# Altium PCB mom-s.PcbDoc (part 1 of 2)
Units mm, origin at the board's own origin, x right, y up, seen from the top; angles counter-clockwise.
Board outline 16 x 18 mm, 4 copper layers (Top Layer, GND, PWR, Bottom Layer), stack 0.774 mm thick; 61 components, 60 nets, 227 pads, 0 vias.
Unrouted connection lines stored in the file: 160.
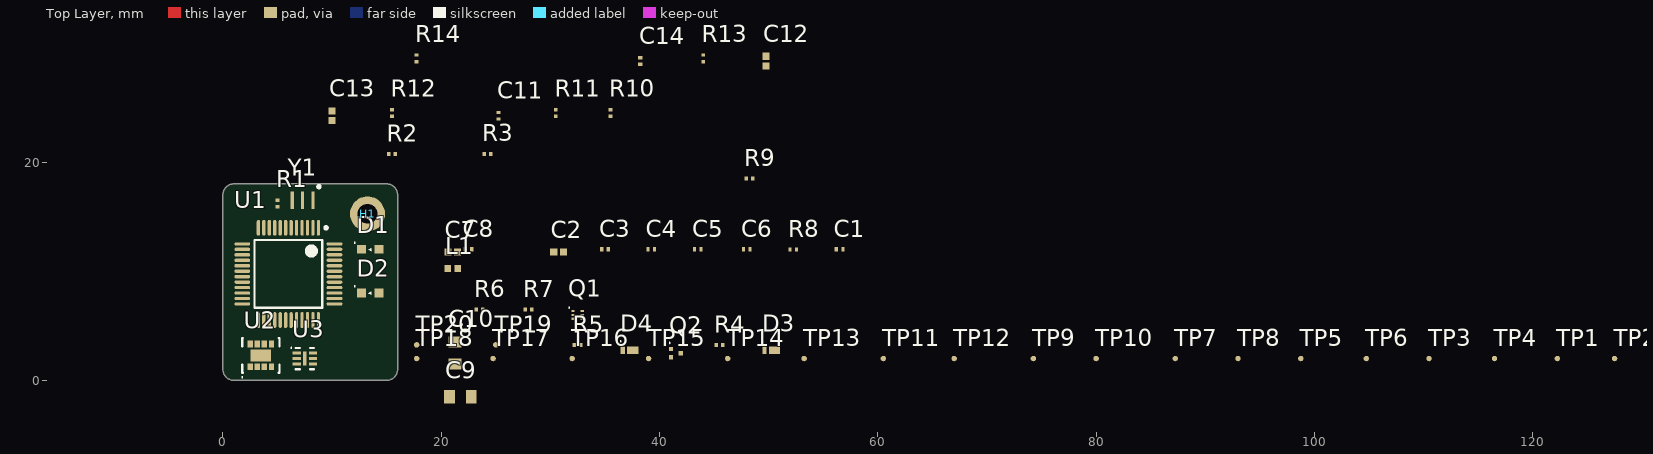
[diagram p0: Top Layer view]
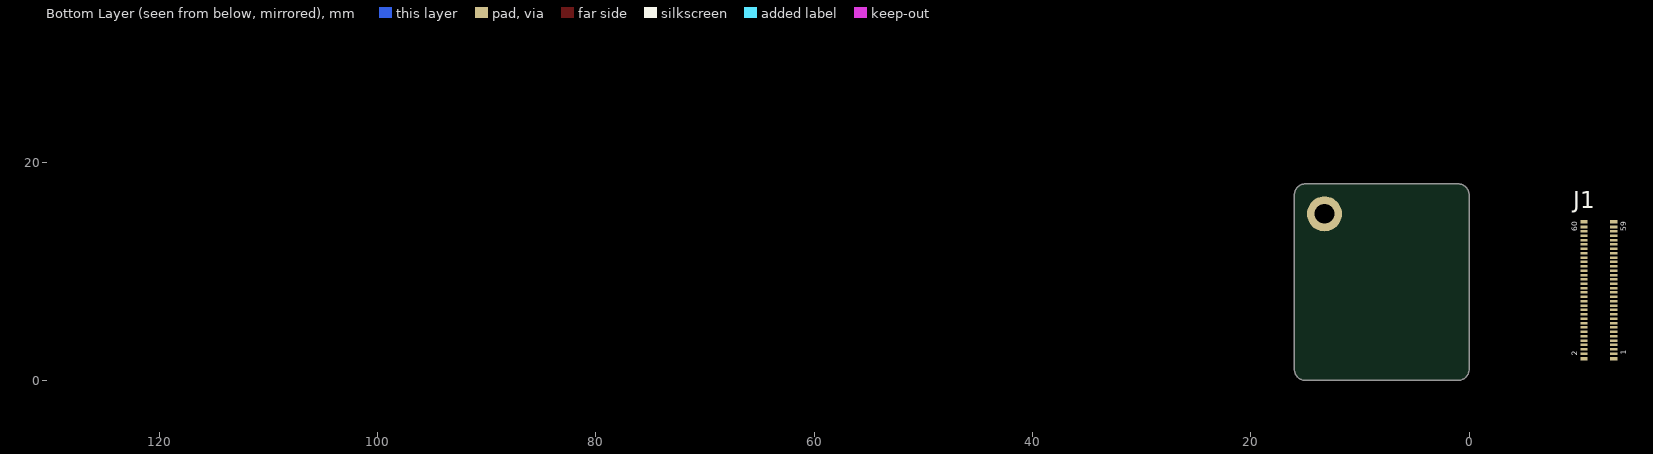
[diagram p1: Bottom Layer view, seen from below]
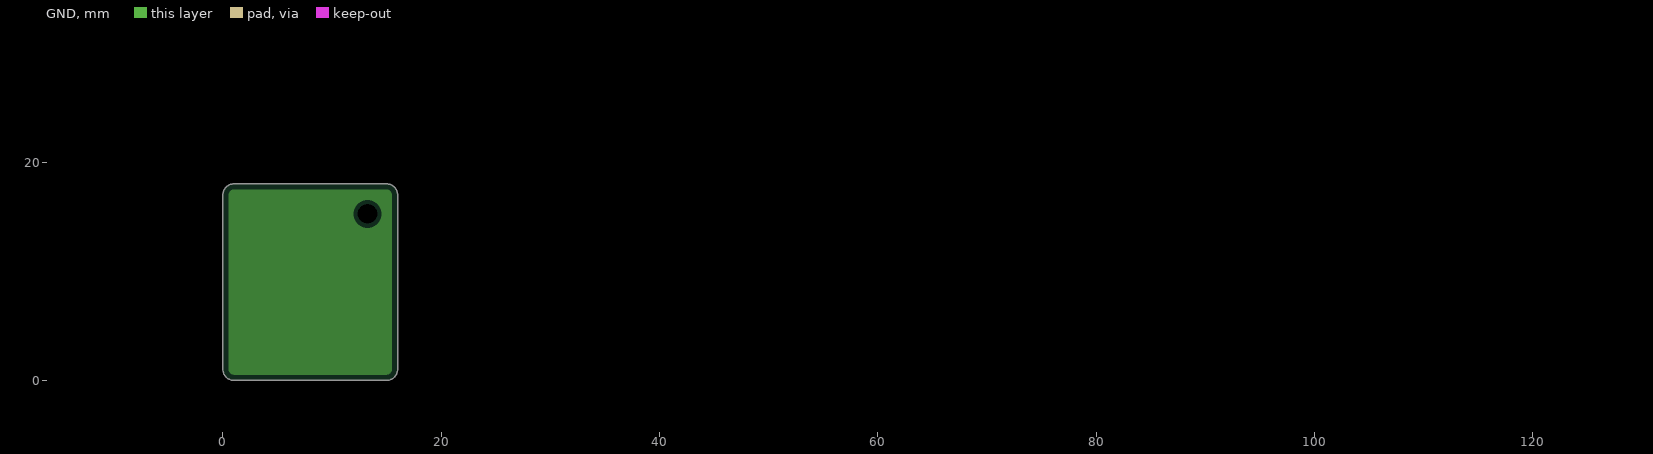
[diagram p2: GND, clearances drawn from the general rule]
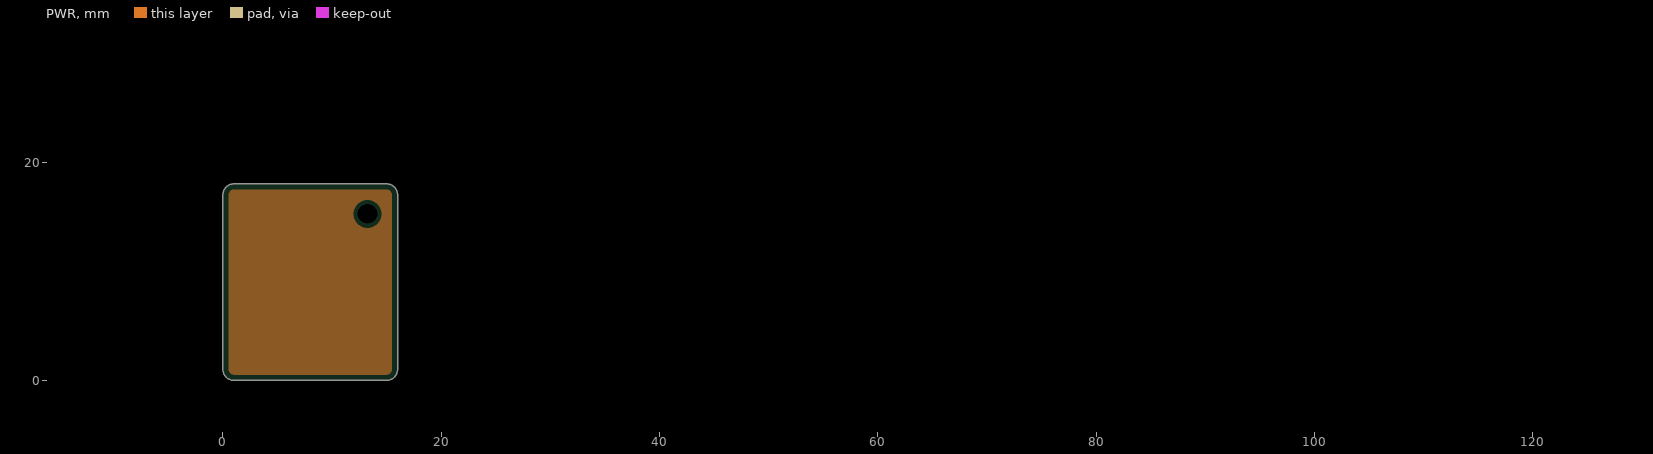
[diagram p3: PWR, clearances drawn from the general rule]

## Layer stack, top to bottom
Top Solder: solder mask 0.0127, Solder Resist, Dk 3.5
Top Layer: signal copper 0.0348
Dielectric 1: prepreg 0.0889, FR-4, Dk 4.2
GND: plane copper 0.0348
Dielectric 3: core 0.4572, Dk 4.2
PWR: plane copper 0.0348
Dielectric 2: prepreg 0.0889, Dk 4.2
Bottom Layer: signal copper 0.0348
Bottom Solder: solder mask 0.0127, Solder Resist, Dk 3.5

## Board outline
0,1 0,17 cw(c1,17) 1,18 15,18 cw(c15,17) 16,17 16,1 cw(c15,1) 15,0 1,0 cw(c1,1)

## Design rules (kind name [scope] priority, off if disabled: settings)
AcuteAngle [All] p1: minimum=6.00000000000000E+0001 checktracksonly=TRUE
BoardOutlineClearance [All] p1: gap=0.254 ignorepadtopadclearanceinfootprint=FALSE
Clearance BGA_1 [WithinRoom('BGA')] p1: gap=0.102 ignorepadtopadclearanceinfootprint=FALSE
Clearance "USB 3H" [InDifferentialPairClass('USB') And Not InComponent('J1', 'J2', 'U3', 'U4') And Not WithinRoom('BGA')] p2: gap=0.267 ignorepadtopadclearanceinfootprint=FALSE
Clearance "Clocks 3H" [InNetClass('Clocks') And Not InComponent('J2', 'U2') And Not WithinRoom('BGA')] p3: gap=0.267 ignorepadtopadclearanceinfootprint=FALSE
Clearance "JTAG 3H Inners" [InNetClass('JTAG') And OnMid] p4: gap=0.305 ignorepadtopadclearanceinfootprint=FALSE
Clearance "JTAG 3H Outers" [InNetClass('JTAG') And OnOutside And Not InComponent('J2', 'U2') And Not WithinRoom('BGA')] p5: gap=0.267 ignorepadtopadclearanceinfootprint=FALSE
Clearance "Default Clearance" [All] p6: gap=0.127 ignorepadtopadclearanceinfootprint=FALSE
ComponentClearance Testpoints [InComponentClass('Testpoints')] p1: gap=0.127 collisioncheckmode=3 verticalgap=0.127 showdistances=FALSE
ComponentClearance "Chip to Chip" [InComponentClass('Chip') vs InComponentClass('Chip')] p2: gap=0.254 collisioncheckmode=3 verticalgap=0.127 showdistances=FALSE
ComponentClearance "All Others" [All] p3: gap=0.635 collisioncheckmode=3 verticalgap=0.127 showdistances=FALSE
DiffPairsRouting USB [InDifferentialPairClass('USB')] p1: maxlimit=0.152 minlimit=0.152 mostfreqgap=0.152 toplayer_minwidth=0.127 toplayer_maxwidth=0.127 toplayer_prefwidth=0.127 bottomlayer_minwidth=0.127 bottomlayer_maxwidth=0.127 bottomlayer_prefwidth=0.127 maxuncoupledlength=12.7
Height "Bottom Max Height" [OnBottom] p1: minheight=0 maxheight=2 prefheight=1.5
Height "Top Max Height" [OnTop] p2: minheight=0 maxheight=3 prefheight=1
HoleToHoleClearance [All] p1: gap=0.127 allowstackedmicrovias=TRUE
Length "Clocks 19mm" [InNetClass('Clocks')] p1: maxlimit=19 minlimit=0
Length "JTAG 100mm" [InNetClass('JTAG')] p2: maxlimit=100 minlimit=0
MatchedLengths "Clocks 0.127mm" [InNetClass('Clocks')] p1: tolerance=0.127 checknetsindiffpair=FALSE checkdiffpairvsdiffpair=TRUE checkxsignals=TRUE checkothers=TRUE
MatchedLengths "USB 3.81mm" [InDifferentialPairClass('USB')] p2: tolerance=3.81 checknetsindiffpair=TRUE checkdiffpairvsdiffpair=FALSE checkxsignals=FALSE checkothers=FALSE
MaxMinImpedance "90ohm DIFF" [InDifferentialPairClass('USB')] p1: minimum=81.00 maximum=99.00
MaxMinImpedance "50ohm SE" [InNetClass('Clocks', 'JTAG')] p2: minimum=45.00 maximum=55.00
MaximumViaCount "USB 1 Via" [InDifferentialPairClass('USB')] p1: limit=1
MinimumAnnularRing "BGA AR" [WithinRoom('BGA')] p1: minimumring=0.076
MinimumAnnularRing [All] p2: minimumring=0.102
MinimumSolderMaskSliver [All] p1: minsoldermaskwidth=0.001
PlaneClearance [All] p1: clearance=0.381
PlaneConnect [All] p1: planeconnectstyle=Direct reliefexpansion=0.508 reliefentries=4 reliefconductorwidth=0.254 reliefairgap=0.254
PolygonConnect [All] p1: connectstyle=Direct reliefconductorwidth=0.254 reliefentries=4 polygonreliefangle="90 Angle" airgapwidth=0.254
RoutingCorners [All] p1: cornerstyle=45-Degree minsetback=0.254 maxsetback=0.254
RoutingLayers "Clocks and USB" [InNetClass('Clocks','USB')] p1: top layer_v5=TRUE bottom layer_v5=TRUE
RoutingLayers "Default Routing" [All] p2: top layer_v5=TRUE bottom layer_v5=TRUE
RoutingVias [All] p1: holewidth=0.203 width=0.457 viastyle="Through Hole" minholewidth=0.203 minwidth=0.406 maxholewidth=100 maxwidth=200
SMDEntry [All] p1: side=TRUE corner=TRUE anyangle=TRUE
SilkToSilkClearance [All] p1: silktosilkclearance=0.127
SilkToSolderMaskClearance [IsPad] p1: minsilkscreentomaskgap=0.127 clearancetoexposedcopper=TRUE
SolderMaskExpansion [All] p1: expansion=0.102
ViasUnderSMD [All] p1: allowed=FALSE
Width "Teensy Power" [InNetClass('Teensy Power')] p1: maxlimit=100 minlimit=0.254 preferedwidth=0.254
Width "Low Power" [InNetClass('Low Power')] p2: maxlimit=100 minlimit=0.254 preferedwidth=0.635
Width "Medium Power" [InNetClass('Medium Power')] p3: maxlimit=100 minlimit=0.254 preferedwidth=1.778
Width "High Power" [InNetClass('High Power')] p4: maxlimit=100 minlimit=0.254 preferedwidth=4.064
Width "Clocks 50ohm" [InNetClass('Clocks')] p5: maxlimit=0.126 minlimit=0.082 preferedwidth=0.102 impedancedriven=TRUE minimp=45.000000 maximp=55.000000 favimp=50.000000
Width "JTAG 50ohm" [InNetClass('JTAG')] p6: maxlimit=0.126 minlimit=0.082 preferedwidth=0.102 impedancedriven=TRUE minimp=45.000000 maximp=55.000000 favimp=50.000000
Width "Default Width" [All] p7: maxlimit=100 minlimit=0.127 preferedwidth=0.203
19 further rules are at their usual default settings.

## Classes and differential pairs
differential pair MCU_USB_D: +MCU_USB_D_P -MCU_USB_D_N

## Components (designator, comment, footprint, x,y, rotation, side; value= is the part's Value field where it differs from the comment)
C1 "0.1uF" C0201 56.5,12 r0 top
C2 "4.7uF" C0402 30.75,11.75 r0 top
C3 "0.1uF" C0201 35,12 r0 top
C4 "0.1uF" C0201 39.25,12 r0 top
C5 "0.1uF" C0201 43.5,12 r0 top
C6 "0.1uF" C0201 48,12 r0 top
C7 "1uF" C0402 21.06,11.75 r0 top
C8 "10000pF" C0201 22.5,12 r0 top
C9 "10uF" C0603 21.75,-1.5 r0 top
C10 "22uF" C0603 21.25,2.5 r90 top
C11 "3300pF" C0201 25.25,24.25 r90 top
C12 "1uF" C0402 49.75,29.25 r90 top
C13 "1uF" C0402 10,24.25 r90 top
C14 "0.1uF" C0201 38.25,29.25 r90 top
D1 "5988091107F" LED0603 13.5,12 r0 top
D2 "5988070107F" LED0603 13.5,8 r0 top
D3 "SDM2U30CSP-7" DIO_X3-WLB1608-2 50.25,2.75 r0 top
D4 "SDM2U30CSP-7" DIO_X3-WLB1608-2 37.25,2.75 r0 top
H1 "M1.6 MNT HOLE" MNT_HOLE_M1.6 13.25,15.25 r0 top
J1 "DF40C-60DP-0.4V(51)" HRS_DF40C_60P_PLG -11.895,8.25 r90 bottom
L1 "BLM15AG601SN1D" L0402 21.045,10.25 r0 top
Q1 "PMDXB600UNE" NXP_DFN1010B-6 32.5,6 r0 top
Q2 "PMXB120EPE" NXP_DFN1010D-3 41.5,2.5 r0 top
R1 "680R" R0201 5,16.2 r90 top
R2 "560R" R0201 15.5,20.75 r0 top
R3 "1k" R0201 24.25,20.75 r0 top
R4 "10k" R0201 45.5,3.25 r0 top
R5 "10k" R0201 32.5,3.25 r0 top
R6 "10k" R0201 23.5,6.5 r0 top
R7 "10k" R0201 28,6.5 r0 top
R8 "10k" R0201 52.25,12 r0 top
R9 "100k" R0201 48.25,18.5 r0 top
R10 "523k" R0201 35.5,24.5 r90 top
R11 "100k" R0201 30.5,24.5 r90 top
R12 "10k" R0201 15.5,24.5 r90 top
R13 "10k" R0201 44,29.5 r90 top
R14 "0R" R0201 17.75,29.5 r90 top
TP1 "TP SMT 0.5MM" TP_SMT_0.5MM 122.25,2 r90 top
TP2 "TP SMT 0.5MM" TP_SMT_0.5MM 127.5,2 r90 top
TP3 "TP SMT 0.5MM" TP_SMT_0.5MM 110.5,2 r90 top
TP4 "TP SMT 0.5MM" TP_SMT_0.5MM 116.5,2 r90 top
TP5 "TP SMT 0.5MM" TP_SMT_0.5MM 98.75,2 r90 top
TP6 "TP SMT 0.5MM" TP_SMT_0.5MM 104.75,2 r90 top
TP7 "TP SMT 0.5MM" TP_SMT_0.5MM 87.25,2 r90 top
TP8 "TP SMT 0.5MM" TP_SMT_0.5MM 93,2 r90 top
TP9 "TP SMT 0.5MM" TP_SMT_0.5MM 74.25,2 r90 top
TP10 "TP SMT 0.5MM" TP_SMT_0.5MM 80,2 r90 top
TP11 "TP SMT 0.5MM" TP_SMT_0.5MM 60.5,2 r90 top
TP12 "TP SMT 0.5MM" TP_SMT_0.5MM 67,2 r90 top
TP13 "TP SMT 0.5MM" TP_SMT_0.5MM 53.25,2 r90 top
TP14 "TP SMT 0.5MM" TP_SMT_0.5MM 46.25,2 r90 top
TP15 "TP SMT 0.5MM" TP_SMT_0.5MM 39,2 r90 top
TP16 "TP SMT 0.5MM" TP_SMT_0.5MM 32,2 r90 top
TP17 "TP SMT 0.5MM" TP_SMT_0.5MM 24.75,2 r90 top
TP18 "TP SMT 0.5MM" TP_SMT_0.5MM 17.75,2 r90 top
TP19 "TP SMT 0.5MM" TP_SMT_0.5MM 25,3.25 r90 top
TP20 "TP SMT 0.5MM" TP_SMT_0.5MM 17.75,3.25 r90 top
U1 "STM32F070CBT6" STM_LQFP48 6,9.75 r270 top
U2 "TPS82140SILT" TI_USIL8_SIL0008D 3.475,2.29 r90 top
U3 "MIC5353-3.3YMT-TR" MCP_MLF6_MT 7.5,2 r0 top
Y1 "CSTCE16M0V53-R0" MUR_CSTCE_V 7.3,16.5 r0 top

## Footprints (in the part's own frame and the unit in brackets; to place one, negate y for a bottom-side part, rotate by r counter-clockwise, add the part's x,y. Pads: shape width x height; smd on the part's side, far side on the other; paste and mask are expansions set on the pad)
C0201 [mm] "Chip Capacitor, 2-Leads, Body 0.60x0.30mm, IPC Medium Density"
  rect 0.3x0.4 smd: 1(-0.3,0) 2(0.3,0)
  body extent -0.32,-0.17 0.32,0.17, height 0.33
C0402 [mm] "Chip Capacitor, 2-Leads, Body 1.00x0.50mm, IPC Medium Density"
  rect 0.66x0.62 smd: 1(-0.44,0) 2(0.44,0)
  body extent -0.53,-0.28 0.53,0.28, height 0.55
C0603 [mm] "Chip Capacitor, 2-Leads, Body 1.60x0.80mm, IPC Medium Density"
  rect 1x1.2 smd: 1(-1,0) 2(1,0)
  body extent -0.87,-0.48 0.87,0.48, height 0.95
DIO_X3-WLB1608-2 [mm] "DFN, 2-Leads, Body 0.80x1.60mm, Pitch 1.28mm, IPC Medium Density"
  rect 0.385x0.69 smd: 1(-0.619,0)
  rect 1.035x0.69 smd: 2(0.293,0)
  Top Layer region: -0.375,0.475
  silkscreen extent -0.86,0.77 -0.76,0.86, body extent -0.82,-0.42 0.82,0.42, height 0.3
HRS_DF40C_60P_PLG [mm] "60 Position Connector Plug, Outer Shroud Contacts Surface Mount Gold"
  rect 0.23x0.66 smd: 1(-5.8,-1.355) 2(-5.8,1.355) 3(-5.4,-1.355) 4(-5.4,1.355) 5(-5,-1.355) 6(-5,1.355) 7(-4.6,-1.355) 8(-4.6,1.355) 9(-4.2,-1.355) 10(-4.2,1.355) 11(-3.8,-1.355) 12(-3.8,1.355) 13(-3.4,-1.355) 14(-3.4,1.355) 15(-3,-1.355) 16(-3,1.355) 17(-2.6,-1.355) 18(-2.6,1.355) 19(-2.2,-1.355) 20(-2.2,1.355) 21(-1.8,-1.355) 22(-1.8,1.355) 23(-1.4,-1.355) 24(-1.4,1.355) 25(-1,-1.355) 26(-1,1.355) 27(-0.6,-1.355) 28(-0.6,1.355) 29(-0.2,-1.355) 30(-0.2,1.355) 31(0.2,-1.355) 32(0.2,1.355) 33(0.6,-1.355) 34(0.6,1.355) 35(1,-1.355) 36(1,1.355) 37(1.4,-1.355) 38(1.4,1.355) 39(1.8,-1.355) 40(1.8,1.355) 41(2.2,-1.355) 42(2.2,1.355) 43(2.6,-1.355) 44(2.6,1.355) 45(3,-1.355) 46(3,1.355) 47(3.4,-1.355) 48(3.4,1.355) 49(3.8,-1.355) 50(3.8,1.355) 51(4.2,-1.355) 52(4.2,1.355) 53(4.6,-1.355) 54(4.6,1.355) 55(5,-1.355) 56(5,1.355) 57(5.4,-1.355) 58(5.4,1.355) 59(5.8,-1.355) 60(5.8,1.355)
  rect 0.35x0.66 smd: 61(-6.275,-1.355) 62(-6.275,1.355) 63(6.275,-1.355) 64(6.275,1.355)
  body extent -6.76,-1.47 6.76,1.5, height 1.11
L0402 [mm] "Chip Inductor, 2-Leads, Body 1.00x0.50mm, IPC Medium Density"
  rect 0.59x0.62 smd: 1(-0.455,0) 2(0.455,0)
  body extent -0.53,-0.28 0.53,0.28, height 0.55
LED0603 [mm] "Chip Diode, 2-Leads, Body 1.60x0.80mm, IPC Medium Density"
  rect 0.8x0.8 smd: 1(-0.8,0) 2(0.8,0)
  silkscreen extent -1.46,-0.13 0.1,0.66, body extent -0.81,-0.39 0.81,0.39, height 0.71
MCP_MLF6_MT [mm] "SON, 6-Leads, Body 1.60x1.60mm, Pitch 0.50mm, Thermal Pad 1.26x0.33mm, IPC Medium Density"
  rect 0.75x0.25 smd: 1(-0.74,0.5) 2(-0.74,0) 3(-0.74,-0.5) 4(0.74,-0.5) 5(0.74,0) 6(0.74,0.5)
  rect 0.33x1.26 smd: 7(0,0)
  silkscreen extent -1.27,-0.98 0.82,1.02, body extent -0.83,-0.82 0.83,0.82, height 0.6
MNT_HOLE_M1.6 [mm] "M1.6 Mounting Hole Footprint"
  round 3.2 hole 1.8: 1(0,0)
MUR_CSTCE_V [mm] "3-SMD Ceramic Resonator, 3.2mm x 1.3mm"
  rect 0.3x1.6 smd: 1(0.95,0) 2(0,0) 3(-0.95,0)
  silkscreen extent 1.38,1.13 1.63,1.37, body extent -1.6,-0.65 1.6,0.65, height 1
NXP_DFN1010B-6 [mm] "SON, 6-Leads, Body 1.10x1.00mm, Pitch 0.35mm, IPC Medium Density"
  rect 0.3x0.2 smd: 1(-0.425,0.35) 2(-0.425,0) 3(-0.425,-0.35) 4(0.425,-0.35) 5(0.425,0) 6(0.425,0.35)
  silkscreen extent -0.84,0.61 -0.74,0.71, body extent -0.53,-0.58 0.53,0.58, height 0.4
NXP_DFN1010D-3 [mm] "DFN, 3-Leads, Body 1.00x1.10mm, Pitch 0.90mm, IPC Medium Density"
  rect 0.4x0.4 smd: 1(-0.45,0.375) 2(-0.45,-0.375) 3(0.45,0)
  silkscreen extent -0.62,0.88 -0.53,0.97, body extent -0.59,-0.53 0.59,0.53, height 0.4
R0201 [mm] "Chip Resistor, 2-Leads, Body 0.60x0.30mm, IPC Medium Density"
  rect 0.3x0.35 smd: 1(-0.3,0) 2(0.3,0)
  body extent -0.32,-0.17 0.32,0.17, height 0.26
STM_LQFP48 [mm] "TSQFP, 48-Leads, Body 7.00x7.00mm, Pitch 0.50mm, IPC Medium Density"
  oval 1.45x0.3 smd: 1(-4.225,2.75) 2(-4.225,2.25) 3(-4.225,1.75) 4(-4.225,1.25) 5(-4.225,0.75) 6(-4.225,0.25) 7(-4.225,-0.25) 8(-4.225,-0.75) 9(-4.225,-1.25) 10(-4.225,-1.75) 11(-4.225,-2.25) 12(-4.225,-2.75) 25(4.225,-2.75) 26(4.225,-2.25) 27(4.225,-1.75) 28(4.225,-1.25) 29(4.225,-0.75) 30(4.225,-0.25) 31(4.225,0.25) 32(4.225,0.75) 33(4.225,1.25) 34(4.225,1.75) 35(4.225,2.25) 36(4.225,2.75)
  oval 0.3x1.45 smd: 13(-2.75,-4.225) 14(-2.25,-4.225) 15(-1.75,-4.225) 16(-1.25,-4.225) 17(-0.75,-4.225) 18(-0.25,-4.225) 19(0.25,-4.225) 20(0.75,-4.225) 21(1.25,-4.225) 22(1.75,-4.225) 23(2.25,-4.225) 24(2.75,-4.225) 37(2.75,4.225) 38(2.25,4.225) 39(1.75,4.225) 40(1.25,4.225) 41(0.75,4.225) 42(0.25,4.225) 43(-0.25,4.225) 44(-0.75,4.225) 45(-1.25,4.225) 46(-1.75,4.225) 47(-2.25,4.225) 48(-2.75,4.225)
  silkscreen extent -4.35,-3.1 3.1,3.58, body extent -4.5,-4.5 4.5,4.5, height 1.6
TI_USIL8_SIL0008D [mm] "PSON, 8-Leads, Body 3.00x2.80mm, Pitch 0.65mm, Thermal Pad 1.90x1.08mm, IPC Medium Density"
  rect 0.6x0.5 smd: 1(-1.04,0.975) 2(-1.04,0.325) 3(-1.04,-0.325) 4(-1.04,-0.975) 5(1.04,-0.975) 6(1.04,-0.325) 7(1.04,0.325) 8(1.04,0.975)
  rect 1.08x1.9 smd: 9(0,0)
  silkscreen extent -2.05,-1.7 1.6,1.75, body extent -1.45,-1.55 1.45,1.55, height 1.53
TP_SMT_0.5MM [mm] "0.5mm SMT Testpoint"
  round 0.5 smd: 1(0,0)

## Part data
C1 C3 C4 C5 C6 C14: library part "0.1uF 16V 0201", "CAP CER 0.1UF 16V X5R 0201", Capacitance=1E-07f, Case/Package=0201, Case Code (Metric)=0603, Dielectric=X5R, Manufacturer=Murata, Manufacturer Part Number=GRM033R61C104ME84D, Max Operating Temperature=85°C, Min Operating Temperature=-55°C, Package Quantity=15000, Supplier Part Number 1=490-9986-1-ND, Tolerance=20%, Voltage Rating=16V, Case Code (Imperial)=0201, ComponentLink1Description=http://www.mouser.com/ds/2/281/c02e-2905.pdf, ComponentLink1URL=http://www.mouser.com/ds/2/281/c02e-2905.pdf, Height=0.3mm, Length=0.024inch, Packaging="Tape and Reel", Pricing 1="1=0.1, 10=0.029, 100=0.013, 500=0.0093, 1000=0.0073, 2500=0.0067, 5000=0.0061 (USD)", Stock 1=660567, Supplier 1=Digi-Key, Termination=SMD/SMT, Thickness=0.013inch, Voltage Rating (DC)=16V, Weight=1.2E-05oz, Width=0.3mm
C2: library part "4.7uF 16V 0402", "CAP CER 4.7UF 16V X5R 0402", Case/Package=0402, Case Code (Metric)=1005, Dielectric=X5R, Manufacturer=Samsung, Manufacturer Part Number=CL05A475MO5NUNC, Max Operating Temperature=85°C, Min Operating Temperature=-55°C, Supplier Part Number 1=1276-6836-1-ND, Tolerance=20%, Voltage Rating=16V, Capacitance=4.7uF, Case Code (Imperial)=0402, Length=0.039inch, Packaging="Tape and Reel", Pricing 1="1=0.36, 10=0.248, 100=0.1485, 500=0.1114, 1000=0.0941, 2500=0.0891, 5000=0.0842 (USD)", Stock 1=282710, Supplier 1=Digi-Key, Thickness=0.022inch, Width=0.02inch
C7 C12 C13: library part "1uF 25V 0402", "CAP CER 1UF 25V X5R 0402", Case/Package=0402, Case Code (Metric)=1005, Dielectric=X5R, Manufacturer="Taiyo Yuden", Manufacturer Part Number=TMK105BJ105MV-F, Max Operating Temperature=85°C, Min Operating Temperature=-55°C, Package Quantity=1, Supplier Part Number 1=587-3245-1-ND, Tolerance=20%, Voltage Rating=25V, Capacitance=1uF, Case Code (Imperial)=0402, ComponentLink1Description=https://datasheet.ciiva.com/11596/tmk105bj105mv-f-ss-11596466.pdf, ComponentLink1URL=https://datasheet.ciiva.com/11596/tmk105bj105mv-f-ss-11596466.pdf, ComponentLink2Description=https://datasheet.ciiva.com/15922/tmk105bj105mv-f-pdf-15922317.pdf, ComponentLink2URL=https://datasheet.ciiva.com/15922/tmk105bj105mv-f-pdf-15922317.pdf, ComponentLink3Description=https://datasheet.ciiva.com/13404/mlcc-all-e-541559-13404206.pdf, ComponentLink3URL=https://datasheet.ciiva.com/13404/mlcc-all-e-541559-13404206.pdf, ComponentLink4Description=https://datasheet.ciiva.com/30154/128tmk105bj105mv-f-30154639.pdf, ComponentLink4URL=https://datasheet.ciiva.com/30154/128tmk105bj105mv-f-30154639.pdf, Composition=Ceramic, Depth=0.5mm, Halogen Free="Halogen Free", Height=0.5mm, Length=1mm, Mount="Surface Mount", Packaging="Tape and Reel", Pricing 1="1=0.2, 10=0.14, 100=0.066, 500=0.0463, 1000=0.0383, 2500=0.0357, 5000=0.0326 (USD)", Radiation Hardening=No, Stock 1=113342, Supplier 1=Digi-Key, Termination=SMD/SMT, Thickness=0.022inch, Voltage Rating (DC)=25V, Width=0.02inch
C8: library part "10000pF 25V 0201", "CAP CER 10000PF 25V X5R 0201", Capacitance=10nF, Case/Package=0201, Case Code (Metric)=0603, Dielectric=X5R, Manufacturer=Murata, Manufacturer Part Number=GRM033R61E103MA12D, Max Operating Temperature=85°C, Min Operating Temperature=-55°C, Supplier Part Number 1=490-9992-1-ND, Tolerance=20%, Voltage Rating=25V, Case Code (Imperial)=0201, ComponentLink1Description=http://search.murata.co.jp/Ceramy/image/img/A01X/partnumbering_e_01.pdf, ComponentLink1URL=http://search.murata.co.jp/Ceramy/image/img/A01X/partnumbering_e_01.pdf, Length=0.024inch, Mount="Surface Mount", Packaging="Tape and Reel", Pricing 1="1=0.1, 10=0.024, 100=0.0106, 500=0.00756, 1000=0.00595, 2500=0.00541, 5000=0.00497 (USD)", Stock 1=20535, Supplier 1=Digi-Key, Thickness=0.013inch, Voltage Rating (DC)=25V, Width=0.012inch
C9: library part "10uF 25V 0603", "CAP CER 10UF 25V X5R 0603", Case/Package=0603, Case Code (Metric)=1608, Dielectric=X5R, Manufacturer=Murata, Manufacturer Part Number=GRM188R61E106MA73D, Max Operating Temperature=85°C, Min Operating Temperature=-55°C, Package Quantity=1, Supplier Part Number 1=490-7202-1-ND, Tolerance=20%, Voltage=25V, Capacitance=10uF, Case Code (Imperial)=0603, ComponentLink1Description=https://datasheet.ciiva.com/22619/c02e-22619674.pdf, ComponentLink1URL=https://datasheet.ciiva.com/22619/c02e-22619674.pdf, ComponentLink2Description=https://datasheet.ciiva.com/22776/608985-22776426.pdf, ComponentLink2URL=https://datasheet.ciiva.com/22776/608985-22776426.pdf, ComponentLink3Description=https://datasheet.ciiva.com/22776/c02e-22776427.pdf, ComponentLink3URL=https://datasheet.ciiva.com/22776/c02e-22776427.pdf, ComponentLink4Description=https://datasheet.ciiva.com/14906/partnumbering-e-01-14906429.pdf, ComponentLink4URL=https://datasheet.ciiva.com/14906/partnumbering-e-01-14906429.pdf, ComponentLink5Description=https://datasheet.ciiva.com/14906/partnumbering-e-01-14906431.pdf, ComponentLink5URL=https://datasheet.ciiva.com/14906/partnumbering-e-01-14906431.pdf, Composition=Ceramic, Depth=0.8mm, Height=0.8mm, Lead Free="Lead Free", Length=1.6mm, Mount="Surface Mount", Number of Pins=2, Packaging="Tape and Reel", Pricing 1="1=0.41, 10=0.285, 100=0.1708, 500=0.1281, 1000=0.1082 (USD)", REACH SVHC="No SVHC", Stock 1=1088965, Supplier 1=Digi-Key, Termination=SMD/SMT, Thickness=0.031inch, Voltage Rating=25V, Voltage Rating (DC)=25V, Weight=0.000222oz, Width=0.031inch
C10: library part "22uF 16V 0603", "CAP CER 22UF 16V X5R 0603", Manufacturer=Samsung, Manufacturer Part Number=CL10A226MO7JZNC, Supplier Part Number 1=1276-7076-1-ND, Stock 1=0, Supplier 1=Digi-Key
C11: library part "3300pF 16V 0201", "CAP CER 3300PF 16V X7R 0201", Capacitance=3.3nF, Case/Package=0201, Case Code (Metric)=0603, Dielectric=X7R, Manufacturer=Murata, Manufacturer Part Number=GRM033R71C332KA88D, Max Operating Temperature=125°C, Min Operating Temperature=-55°C, Package Quantity=1, Supplier Part Number 1=490-3191-1-ND, Tolerance=10%, Voltage Rating=16V, Case Code (Imperial)=0201, ComponentLink1Description=https://datasheet.ciiva.com/11620/product-11620449.pdf, ComponentLink1URL=https://datasheet.ciiva.com/11620/product-11620449.pdf, ComponentLink2Description=https://datasheet.ciiva.com/129/grm033r71c332ka88-01-129900.pdf, ComponentLink2URL=https://datasheet.ciiva.com/129/grm033r71c332ka88-01-129900.pdf, ComponentLink3Description=https://datasheet.ciiva.com/129/grm033r71c332ka88-01-129901.pdf, ComponentLink3URL=https://datasheet.ciiva.com/129/grm033r71c332ka88-01-129901.pdf, ComponentLink4Description=https://datasheet.ciiva.com/18184/getdatasheetpartid-467171-18184093.pdf, ComponentLink4URL=https://datasheet.ciiva.com/18184/getdatasheetpartid-467171-18184093.pdf, ComponentLink5Description=https://datasheet.ciiva.com/129/grm033r71c332ka88-01-129902.pdf, ComponentLink5URL=https://datasheet.ciiva.com/129/grm033r71c332ka88-01-129902.pdf, ComponentLink6Description=https://datasheet.ciiva.com/29199/455779-da-01-en-vs-kondensator-0201-29199166.pdf, ComponentLink6URL=https://datasheet.ciiva.com/29199/455779-da-01-en-vs-kondensator-0201-29199166.pdf, Depth=0.3mm, Height=0.3mm, Lead Free="Lead Free", Length=0.6mm, Material=Ceramic, Mount="Surface Mount", Packaging="Tape and Reel", Pricing 1="1=0.1, 10=0.029, 100=0.013, 500=0.0093, 1000=0.0073, 2500=0.0067, 5000=0.0061 (USD)", Radiation Hardening=No, Stock 1=49387, Supplier 1=Digi-Key, Termination=SMD/SMT, Thickness=0.013inch, Voltage Rating (DC)=16V, Width=0.012inch
D1: library part "Blue 0603 LED", "LED BLUE CLEAR 0603 SMD", Case/Package=0603, Case Code (Metric)=1608, Colour=Blue, Forward Current=20mA, Forward Voltage=3.2V, Lens Colour=Clear,Colorless, Manufacturer=Dialight, Manufacturer Part Number=598-8091-107F, Max Operating Temperature=100°C, Min Operating Temperature=-30°C, Package Quantity=4000, Power Dissipation=70mW, Supplier Part Number 1=350-2037-1-ND, Case Code (Imperial)=0603, ComponentLink1Description=https://datasheet.ciiva.com/15118/getdatasheetpartid-194139-15118048.pdf, ComponentLink1URL=https://datasheet.ciiva.com/15118/getdatasheetpartid-194139-15118048.pdf, ComponentLink2Description=https://datasheet.ciiva.com/2111/598-series-0603-pkg-2111556.pdf, ComponentLink2URL=https://datasheet.ciiva.com/2111/598-series-0603-pkg-2111556.pdf, ComponentLink3Description=https://datasheet.ciiva.com/2111/598-series-0603-pkg-2111557.pdf, ComponentLink3URL=https://datasheet.ciiva.com/2111/598-series-0603-pkg-2111557.pdf, ComponentLink4Description=https://datasheet.ciiva.com/15965/mdei5980603-15965445.pdf, ComponentLink4URL=https://datasheet.ciiva.com/15965/mdei5980603-15965445.pdf, ComponentLink5Description=https://datasheet.ciiva.com/30240/mdei5980603-30240533.pdf, ComponentLink5URL=https://datasheet.ciiva.com/30240/mdei5980603-30240533.pdf, ComponentLink6Description=https://datasheet.ciiva.com/2111/598-series-0603-pkg-2111558.pdf, ComponentLink6URL=https://datasheet.ciiva.com/2111/598-series-0603-pkg-2111558.pdf, ComponentLink7Description=https://datasheet.ciiva.com/7970/25658-7970182.pdf, ComponentLink7URL=https://datasheet.ciiva.com/7970/25658-7970182.pdf, ComponentLink8Description=https://datasheet.ciiva.com/14603/70081992-14603963.pdf, ComponentLink8URL=https://datasheet.ciiva.com/14603/70081992-14603963.pdf, ComponentLink9Description=https://datasheet.ciiva.com/16400/smt-selector-guide-16400478.pdf, ComponentLink9URL=https://datasheet.ciiva.com/16400/smt-selector-guide-16400478.pdf, Depth=0.8mm, Dominant Wavelength=470nm, Height=0.7mm, Illumination Colour=Blue, Lead Free="Lead Free", Length=1.6mm, Lens Style=Clear,Diffused,Colorless,Rectangular, Lens Transparency=Clear, Luminous Intensity=140mcd, Mount="Surface Mount", Number of Elements=1, Number of LEDs=1, Number of Pins=2, Packaging="Tape and Reel", Pricing 1="1=0.75, 10=0.583, 25=0.4864, 100=0.4189, 250=0.374, 500=0.3216, 1000=0.2483 (USD)", Radiation Hardening=No, REACH SVHC="No SVHC", Stock 1=42042, Supplier 1=Digi-Key, Test Current=20mA, Viewing Angle=140°, Wavelength=475nm, Width=0.8mm
D2: library part "Green 0603 LED", "LED GREEN CLEAR 0603 SMD", Case/Package=0603, Case Code (Metric)=1608, Colour=Green, Forward Current=20mA, Forward Voltage=2V, Lens Colour=Clear, Manufacturer=Dialight, Manufacturer Part Number=598-8070-107F, Max Operating Temperature=100°C, Min Operating Temperature=-30°C, Package Quantity=4000, Power Dissipation=60mW, Supplier Part Number 1=350-2035-1-ND, Case Code (Imperial)=0603, ComponentLink1Description=https://datasheet.ciiva.com/4688/598-selectorguide-18902-4688880.pdf, ComponentLink1URL=https://datasheet.ciiva.com/4688/598-selectorguide-18902-4688880.pdf, ComponentLink2Description=https://datasheet.ciiva.com/11774/0900766b80ae2975-11774257.pdf, ComponentLink2URL=https://datasheet.ciiva.com/11774/0900766b80ae2975-11774257.pdf, ComponentLink3Description=https://datasheet.ciiva.com/1243/1484480-1243893.pdf, ComponentLink3URL=https://datasheet.ciiva.com/1243/1484480-1243893.pdf, ComponentLink4Description=https://datasheet.ciiva.com/2110/598-series-0603-pkg-2110165.pdf, ComponentLink4URL=https://datasheet.ciiva.com/2110/598-series-0603-pkg-2110165.pdf, ComponentLink5Description=https://datasheet.ciiva.com/1243/1484480-1243894.pdf, ComponentLink5URL=https://datasheet.ciiva.com/1243/1484480-1243894.pdf, ComponentLink6Description=https://datasheet.ciiva.com/2110/598-series-0603-pkg-2110166.pdf, ComponentLink6URL=https://datasheet.ciiva.com/2110/598-series-0603-pkg-2110166.pdf, ComponentLink7Description=https://datasheet.ciiva.com/2110/598-series-0603-pkg-2110167.pdf, ComponentLink7URL=https://datasheet.ciiva.com/2110/598-series-0603-pkg-2110167.pdf, ComponentLink8Description=https://datasheet.ciiva.com/14605/70081990-14605530.pdf, ComponentLink8URL=https://datasheet.ciiva.com/14605/70081990-14605530.pdf, ComponentLink9Description=https://datasheet.ciiva.com/15965/mdei5980603-15965419.pdf, ComponentLink9URL=https://datasheet.ciiva.com/15965/mdei5980603-15965419.pdf, ComponentLink10Description=https://datasheet.ciiva.com/30188/mdei5980603-30188139.pdf, ComponentLink10URL=https://datasheet.ciiva.com/30188/mdei5980603-30188139.pdf, ComponentLink11Description=https://datasheet.ciiva.com/15117/getdatasheetpartid-146438-15117836.pdf, ComponentLink11URL=https://datasheet.ciiva.com/15117/getdatasheetpartid-146438-15117836.pdf, ComponentLink12Description=https://datasheet.ciiva.com/22749/1484480-22749228.pdf, ComponentLink12URL=https://datasheet.ciiva.com/22749/1484480-22749228.pdf, ComponentLink13Description=https://datasheet.ciiva.com/16400/smt-selector-guide-16400463.pdf, ComponentLink13URL=https://datasheet.ciiva.com/16400/smt-selector-guide-16400463.pdf, Depth=0.8mm, Dominant Wavelength=568nm, Height=0.7mm, Illumination Colour=Green, Lead Free="Lead Free", Length=1.6mm, Lens Style=Clear,Diffused,Colorless,Rectangular, Luminous Intensity=20mcd, Mount="Surface Mount", Number of Elements=1, Number of LEDs=1, Number of Pins=2, Packaging="Tape and Reel", Pricing 1="1=0.45, 10=0.327, 25=0.2504, 100=0.1634, 250=0.1198, 500=0.1016, 1000=0.0835 (USD)", Radiation Hardening=No, REACH SVHC="No SVHC", Stock 1=147636, Supplier 1=Digi-Key, Test Current=20mA, Viewing Angle=140°, Wavelength=570nm, Width=0.8mm
D3 D4: "DIODE SCHTKY 30V 2A X3-WLB1608-2", Average Rectified Current=2A, Capacitance=1.1E-10f, Forward Voltage=480mV, Manufacturer=Diodes, Max Forward Surge Current (Ifsm)=20A, Max Operating Temperature=150°C, Max Repetitive Reverse Voltage (Vrrm)=20V, Max Reverse Voltage (DC)=30V, Min Operating Temperature=-55°C, Package Quantity=5000, Peak Reverse Current=150uA, Supplier Part Number 1=SDM2U30CSP-7DICT-ND, Element Configuration=Single, Forward Current=2A, Manufacturer Part Number=SDM2U30CSP-7, Mount="Surface Mount", Number of Pins=2, Packaging="Tape and Reel", Pricing 1="1=0.39, 10=0.32, 100=0.2175, 500=0.16316, 1000=0.12236 (USD)", Reverse Voltage (DC)=20V, Stock 1=13123, Supplier 1=Digi-Key
H1: "M1.6 Mounting Hole"
J1: library part "60P 0.4mm Hirose Conn Plug", "CONN HDR 60POS 0.4MM SMD GOLD", Case/Package=SMD/SMT, Current Rating=300mA, Manufacturer=Hirose, Package Quantity=5000, Supplier Part Number 1=H11628CT-ND, Voltage Rating=30V, ComponentLink1Description=https://datasheet.ciiva.com/46408/1824826-46408908.pdf, ComponentLink1URL=https://datasheet.ciiva.com/46408/1824826-46408908.pdf, Connector Type=Plug, Contact Material=Bronze, Contact Plating=Gold, Gender=Male, Housing Material=Polymer, Lead Free="Lead Free", Manufacturer Part Number=DF40C-60DP-0.4V(51), Mount="Surface Mount", Number of Contacts=60, Number of Positions=60, Number of Rows=2, Packaging="Tape and Reel", Pitch=0.4mm, Pricing 1="1=1.24, 10=1.094, 25=1.0296, 50=0.9868, 100=0.9438, 250=0.858, 500=0.7722, 1000=0.6864, 2500=0.6221 (USD)", REACH SVHC="No SVHC", Stack Height=3.5mm, Stock 1=18849, Supplier 1=Digi-Key, Termination=SMD/SMT
L1: "FERRITE BEAD 600 OHM 0402 1LN", Case/Package=0402, Case Code (Metric)=1005, Current Rating=300mA, DC Resistance (DCR)=520mR, Frequency=100MHz, Manufacturer=Murata, Max Operating Temperature=125°C, Min Operating Temperature=-55°C, Package Quantity=10000, Supplier Part Number 1=490-1006-1-ND, Tolerance=25%, Case Code (Imperial)=0402, ComponentLink1Description=https://datasheet.ciiva.com/6212/l0110s0100blm15ag-sn-6212565.pdf, ComponentLink1URL=https://datasheet.ciiva.com/6212/l0110s0100blm15ag-sn-6212565.pdf, ComponentLink2Description=https://datasheet.ciiva.com/6212/l0110s0100blm15ag-sn-6212519.pdf, ComponentLink2URL=https://datasheet.ciiva.com/6212/l0110s0100blm15ag-sn-6212519.pdf, ComponentLink3Description=https://datasheet.ciiva.com/1466/5144-1466744.pdf, ComponentLink3URL=https://datasheet.ciiva.com/1466/5144-1466744.pdf, ComponentLink4Description=https://datasheet.ciiva.com/6212/l0110s0100blm15ag-sn-6212520.pdf, ComponentLink4URL=https://datasheet.ciiva.com/6212/l0110s0100blm15ag-sn-6212520.pdf, ComponentLink5Description=https://datasheet.ciiva.com/1466/5144-1466745.pdf, ComponentLink5URL=https://datasheet.ciiva.com/1466/5144-1466745.pdf, ComponentLink6Description=https://datasheet.ciiva.com/11799/0900766b811b5866-11799226.pdf, ComponentLink6URL=https://datasheet.ciiva.com/11799/0900766b811b5866-11799226.pdf, ComponentLink7Description=https://datasheet.ciiva.com/8510/l0110s0100blm15ag-sn-8510909.pdf, ComponentLink7URL=https://datasheet.ciiva.com/8510/l0110s0100blm15ag-sn-8510909.pdf, ComponentLink8Description=https://datasheet.ciiva.com/14122/blm-series-eng-tds-14122894.pdf, ComponentLink8URL=https://datasheet.ciiva.com/14122/blm-series-eng-tds-14122894.pdf, ComponentLink9Description=https://datasheet.ciiva.com/8084/l0110s0100blm15ag-sn-8084271.pdf, ComponentLink9URL=https://datasheet.ciiva.com/8084/l0110s0100blm15ag-sn-8084271.pdf, ComponentLink10Description=https://datasheet.ciiva.com/29347/442210-da-01-en-chip-drossel-0402-600r-300ma-1-0x0-5mm-29347879.pdf, ComponentLink10URL=https://datasheet.ciiva.com/29347/442210-da-01-en-chip-drossel-0402-600r-300ma-1-0x0-5mm-29347879.pdf, ComponentLink11Description=https://datasheet.ciiva.com/41449/001172163-da-01-en-drossel-0402-600r-1-0x0-5mm-10000st-41449450.pdf, ComponentLink11URL=https://datasheet.ciiva.com/41449/001172163-da-01-en-drossel-0402-600r-1-0x0-5mm-10000st-41449450.pdf, Core Material=Ferrite, DC Current=300mA, Depth=0.55mm, Height=0.5mm, Impedance=600R, Lead Free="Lead Free", Length=1mm, Manufacturer Part Number=BLM15AG601SN1D, Material=Steel,Ferrite, Max Current Rating=300mA, Max DC Current=300mA, Military Standard=Not, Number of Circuits=1, Number of Lines=1, Number of Pins=2, Packaging="Tape and Reel", Pricing 1="1=0.1, 10=0.069, 25=0.0628, 50=0.0564, 100=0.0414, 250=0.03008, 500=0.02758, 1000=0.02383, 5000=0.01881 (USD)", Radiation Hardening=No, REACH SVHC="No SVHC", Shielding=Unshielded, Stock 1=1368913, Supplier 1=Digi-Key, Termination=SMD/SMT, Test Frequency=100MHz, Width=0.5mm
Q1: "MOSFET 2N-CH 20V 0.6A 6DFN", Case/Package=600, Continuous Drain Current (ID)=600mA, Drain to Source Voltage (Vdss)=20V, Input Capacitance=21.3pF, Manufacturer="NXP Semiconductors", Max Operating Temperature=150°C, Max Power Dissipation=265mW, Min Operating Temperature=-55°C, Supplier Part Number 1=1727-1470-1-ND, Threshold Voltage=700mV, ComponentLink1Description=https://datasheet.ciiva.com/29589/pmdxb600une-29589931.pdf, ComponentLink1URL=https://datasheet.ciiva.com/29589/pmdxb600une-29589931.pdf, ComponentLink2Description=https://datasheet.ciiva.com/29589/pmdxb600une-29589932.pdf, ComponentLink2URL=https://datasheet.ciiva.com/29589/pmdxb600une-29589932.pdf, ComponentLink3Description=https://datasheet.ciiva.com/29589/pmdxb600une-29589933.pdf, ComponentLink3URL=https://datasheet.ciiva.com/29589/pmdxb600une-29589933.pdf, Manufacturer Part Number=PMDXB600UNE, Number of Pins=6, Packaging="Tape and Reel", Pricing 1="1=0.65, 10=0.552, 100=0.4124, 500=0.324, 1000=0.2504 (USD)", Rds On Max=620mR, REACH SVHC="No SVHC", Stock 1=27879, Supplier 1=Digi-Key
Q2: "MOSFET P-CH 30V 2.4A 3DFN", Continuous Drain Current (ID)=2.4A, Drain to Source Voltage (Vdss)=30V, Input Capacitance=309pF, Manufacturer="NXP Semiconductors", Max Operating Temperature=150°C, Max Power Dissipation=400mW, Min Operating Temperature=-55°C, Package Quantity=5000, Resistance=0.1R, Supplier Part Number 1=1727-1472-1-ND, Threshold Voltage=-1.5V, ComponentLink1Description=https://datasheet.ciiva.com/29748/pmxb120epe-29748512.pdf, ComponentLink1URL=https://datasheet.ciiva.com/29748/pmxb120epe-29748512.pdf, ComponentLink2Description=https://datasheet.ciiva.com/29748/pmxb120epe-29748520.pdf, ComponentLink2URL=https://datasheet.ciiva.com/29748/pmxb120epe-29748520.pdf, Manufacturer Part Number=PMXB120EPE, Mount="Surface Mount", Number of Pins=3, Packaging="Tape and Reel", Pricing 1="1=0.5, 10=0.393, 100=0.2695, 500=0.18478, 1000=0.13859 (USD)", Rds On Max=120mR, REACH SVHC="No SVHC", Stock 1=23, Supplier 1=Digi-Key
R1: library part "680R 0201", "RES SMD 680 OHM 1% 1/20W 0201", Case/Package=0201, Case Code (Metric)=0603, Manufacturer=Yageo, Manufacturer Part Number=RC0201FR-07680RL, Max Operating Temperature=125°C, Max Power Dissipation=50mW, Min Operating Temperature=-55°C, Supplier Part Number 1=YAG2769CT-ND, Temperature Coefficient=200ppm/°C, Tolerance=1%, Voltage Rating=25V, Case Code (Imperial)=0201, ComponentLink1Description=https://datasheet.ciiva.com/7672/1563626-7672238.pdf, ComponentLink1URL=https://datasheet.ciiva.com/7672/1563626-7672238.pdf, Composition="Thick Film", Depth=0.3mm, Height=0.01inch, Lead Free="Lead Free", Length=0.6mm, Military Standard=Not, Number of Terminations=2, Packaging="Tape and Reel", Power Rating=50mW, Pricing 1="1=0.1, 10=0.046, 100=0.0187, 1000=0.00841, 2500=0.0073, 5000=0.00603 (USD)", REACH SVHC="No SVHC", Resistance=680R, Stock 1=13371, Supplier 1=Digi-Key, Termination=SMD/SMT, Width=0.012inch
R2: library part "560R 0201", "RES SMD 560 OHM 1% 1/20W 0201", Case/Package=0201, Case Code (Metric)=0603, Manufacturer="Panasonic ECG", Manufacturer Part Number=ERJ-1GEF5600C, Max Operating Temperature=125°C, Max Power Dissipation=50mW, Min Operating Temperature=-55°C, Package Quantity=15000, Supplier Part Number 1=P560ABCT-ND, Temperature Coefficient=200ppm/°C, Tolerance=1%, Voltage Rating=25V, Voltage Rating (DC)=15V, Case Code (Imperial)=0201, ComponentLink1Description=https://datasheet.ciiva.com/2440/erj-g-r-e-rev08-2440588.pdf, ComponentLink1URL=https://datasheet.ciiva.com/2440/erj-g-r-e-rev08-2440588.pdf, ComponentLink2Description=https://datasheet.ciiva.com/2440/erj-g-r-e-rev08-2440589.pdf, ComponentLink2URL=https://datasheet.ciiva.com/2440/erj-g-r-e-rev08-2440589.pdf, ComponentLink3Description=https://datasheet.ciiva.com/2440/erj-g-r-e-rev08-2440590.pdf, ComponentLink3URL=https://datasheet.ciiva.com/2440/erj-g-r-e-rev08-2440590.pdf, Composition="Thick Film", Contact Plating=Tin, Depth=0.3mm, Height=0.01inch, Lead Free="Lead Free", Length=0.6mm, Military Standard=Not, Mount="Surface Mount", Number of Terminations=2, Packaging="Tape and Reel", Power Rating=50mW, Pricing 1="1=0.1, 10=0.059, 100=0.024, 1000=0.0108, 2500=0.0094, 5000=0.0077 (USD)", Radiation Hardening=No, Resistance=560R, Stock 1=11988, Supplier 1=Digi-Key, Width=0.3mm
R3: library part "1k 0201", "RES SMD 1K OHM 1% 1/20W 0201", Case/Package=0201, Case Code (Metric)=0603, Manufacturer="Panasonic ECG", Manufacturer Part Number=ERJ-1GEF1001C, Max Operating Temperature=125°C, Max Power Dissipation=50mW, Min Operating Temperature=-55°C, Package Quantity=15000, Resistance=1KR, Supplier Part Number 1=P1.00KABCT-ND, Temperature Coefficient=200ppm/°C, Tolerance=1%, Voltage Rating=25V, Voltage Rating (DC)=15V, Case Code (Imperial)=0201, ComponentLink1Description=https://datasheet.ciiva.com/28532/1694929-28532042.pdf, ComponentLink1URL=https://datasheet.ciiva.com/28532/1694929-28532042.pdf, ComponentLink2Description=https://datasheet.ciiva.com/16763/70260683-16763516.pdf, ComponentLink2URL=https://datasheet.ciiva.com/16763/70260683-16763516.pdf, ComponentLink3Description=https://datasheet.ciiva.com/16199/erj-1gef1001c-16199565.pdf, ComponentLink3URL=https://datasheet.ciiva.com/16199/erj-1gef1001c-16199565.pdf, ComponentLink4Description=https://datasheet.ciiva.com/30155/aoa0000ce2-30155870.pdf, ComponentLink4URL=https://datasheet.ciiva.com/30155/aoa0000ce2-30155870.pdf, ComponentLink5Description=https://datasheet.ciiva.com/7942/1678796-7942463.pdf, ComponentLink5URL=https://datasheet.ciiva.com/7942/1678796-7942463.pdf, ComponentLink6Description=https://datasheet.ciiva.com/16782/70260683-16782463.pdf, ComponentLink6URL=https://datasheet.ciiva.com/16782/70260683-16782463.pdf, Composition="Thick Film", Contact Plating=Tin, Depth=0.3mm, Height=0.23mm, Lead Free="Lead Free", Length=0.6mm, Military Standard=Not, Mount="Surface Mount", Number of Terminations=2, Packaging="Tape and Reel", Power Rating=50mW, Pricing 1="1=0.1, 10=0.059, 100=0.024, 1000=0.0108, 2500=0.0094, 5000=0.0077 (USD)", Radiation Hardening=No, REACH SVHC=Unknown, Stock 1=3138057, Supplier 1=Digi-Key, Termination=SMD/SMT, Width=0.012inch
R4 R5 R6 R7 R8 R12 R13: library part "10k 0201", "RES SMD 10K OHM 1% 1/20W 0201", Case/Package=0201, Case Code (Metric)=0603, Manufacturer="Panasonic ECG", Manufacturer Part Number=ERJ-1GEF1002C, Max Operating Temperature=125°C, Max Power Dissipation=50mW, Min Operating Temperature=-55°C, Package Quantity=15000, Resistance=10KR, Supplier Part Number 1=P10.0KABCT-ND, Temperature Coefficient=200ppm/°C, Tolerance=1%, Voltage Rating=25V, Voltage Rating (DC)=15V, Case Code (Imperial)=0201, ComponentLink1Description=https://datasheet.ciiva.com/16427/erj-1gef1002c-16427252.pdf, ComponentLink1URL=https://datasheet.ciiva.com/16427/erj-1gef1002c-16427252.pdf, ComponentLink2Description=https://datasheet.ciiva.com/30111/aoa0000ce2-30111653.pdf, ComponentLink2URL=https://datasheet.ciiva.com/30111/aoa0000ce2-30111653.pdf, ComponentLink3Description=https://datasheet.ciiva.com/16775/70260683-16775527.pdf, ComponentLink3URL=https://datasheet.ciiva.com/16775/70260683-16775527.pdf, ComponentLink4Description=https://datasheet.ciiva.com/22785/1678796-22785991.pdf, ComponentLink4URL=https://datasheet.ciiva.com/22785/1678796-22785991.pdf, ComponentLink5Description=https://datasheet.ciiva.com/7830/1678796-7830952.pdf, ComponentLink5URL=https://datasheet.ciiva.com/7830/1678796-7830952.pdf, ComponentLink6Description=https://datasheet.ciiva.com/16770/70260683-16770095.pdf, ComponentLink6URL=https://datasheet.ciiva.com/16770/70260683-16770095.pdf, Composition="Thick Film", Contact Plating=Tin, Depth=0.3mm, Height=0.23mm, Lead Free="Lead Free", Length=0.6mm, Military Standard=Not, Mount="Surface Mount", Number of Terminations=2, Packaging="Tape and Reel", Power Rating=50mW, Pricing 1="1=0.1, 10=0.059, 100=0.024, 1000=0.0108, 2500=0.0094, 5000=0.0077 (USD)", Radiation Hardening=No, REACH SVHC=Unknown, Stock 1=4709989, Supplier 1=Digi-Key, Termination=SMD/SMT, Width=0.012inch
R9 R11: library part "100k 0201", "RES SMD 100K OHM 1% 1/20W 0201", Case/Package=0201, Case Code (Metric)=0603, Manufacturer="Panasonic ECG", Manufacturer Part Number=ERJ-1GEF1003C, Max Operating Temperature=125°C, Max Power Dissipation=50mW, Min Operating Temperature=-55°C, Package Quantity=1, Resistance=100KR, Supplier Part Number 1=P100KABCT-ND, Temperature Coefficient=200ppm/°C, Tolerance=1%, Voltage Rating=25V, Voltage Rating (DC)=15V, Case Code (Imperial)=0201, ComponentLink1Description=https://datasheet.ciiva.com/2439/erj-g-r-e-rev08-2439265.pdf, ComponentLink1URL=https://datasheet.ciiva.com/2439/erj-g-r-e-rev08-2439265.pdf, ComponentLink2Description=https://datasheet.ciiva.com/2439/erj-g-r-e-rev08-2439266.pdf, ComponentLink2URL=https://datasheet.ciiva.com/2439/erj-g-r-e-rev08-2439266.pdf, ComponentLink3Description=https://datasheet.ciiva.com/2439/erj-g-r-e-rev08-2439267.pdf, ComponentLink3URL=https://datasheet.ciiva.com/2439/erj-g-r-e-rev08-2439267.pdf, ComponentLink4Description=https://datasheet.ciiva.com/7830/1678796-7830953.pdf, ComponentLink4URL=https://datasheet.ciiva.com/7830/1678796-7830953.pdf, ComponentLink5Description=https://datasheet.ciiva.com/16205/erj-1gef1003c-16205689.pdf, ComponentLink5URL=https://datasheet.ciiva.com/16205/erj-1gef1003c-16205689.pdf, ComponentLink6Description=https://datasheet.ciiva.com/16782/70260683-16782969.pdf, ComponentLink6URL=https://datasheet.ciiva.com/16782/70260683-16782969.pdf, ComponentLink7Description=https://datasheet.ciiva.com/28514/1694929-28514010.pdf, ComponentLink7URL=https://datasheet.ciiva.com/28514/1694929-28514010.pdf, ComponentLink8Description=https://datasheet.ciiva.com/30087/aoa0000ce2-30087131.pdf, ComponentLink8URL=https://datasheet.ciiva.com/30087/aoa0000ce2-30087131.pdf, Composition="Thick Film", Contact Plating=Tin, Depth=0.3mm, Height=0.01inch, Lead Free="Lead Free", Length=0.6mm, Military Standard=Not, Mount="Surface Mount", Number of Terminations=2, Packaging="Tape and Reel", Power Rating=50mW, Pricing 1="1=0.1, 10=0.059, 100=0.024, 1000=0.0108, 2500=0.0094, 5000=0.0077 (USD)", Radiation Hardening=No, REACH SVHC=Unknown, Stock 1=4025669, Supplier 1=Digi-Key, Termination=SMD/SMT, Width=0.012inch
R10: library part "523k 0201", "RES SMD 523K OHM 1% 1/20W 0201", Case/Package=0201, Case Code (Metric)=0603, Manufacturer="Panasonic ECG", Manufacturer Part Number=ERJ-1GEF5233C, Max Operating Temperature=125°C, Max Power Dissipation=50mW, Min Operating Temperature=-55°C, Package Quantity=1, Resistance=523KR, Supplier Part Number 1=P523KABCT-ND, Temperature Coefficient=200ppm/°C, Tolerance=1%, Voltage Rating=25V, Voltage Rating (DC)=15V, Case Code (Imperial)=0201, ComponentLink1Description=https://datasheet.ciiva.com/2440/erj-g-r-e-rev08-2440225.pdf, ComponentLink1URL=https://datasheet.ciiva.com/2440/erj-g-r-e-rev08-2440225.pdf, ComponentLink2Description=https://datasheet.ciiva.com/2440/erj-g-r-e-rev08-2440226.pdf, ComponentLink2URL=https://datasheet.ciiva.com/2440/erj-g-r-e-rev08-2440226.pdf, ComponentLink3Description=https://datasheet.ciiva.com/2440/erj-g-r-e-rev08-2440227.pdf, ComponentLink3URL=https://datasheet.ciiva.com/2440/erj-g-r-e-rev08-2440227.pdf, Composition="Thick Film", Contact Plating=Tin, Height=0.01inch, Lead Free="Lead Free", Length=0.024inch, Mount="Surface Mount", Number of Terminations=2, Packaging="Tape and Reel", Power Rating=50mW, Pricing 1="1=0.1, 10=0.059, 100=0.024, 1000=0.0108, 2500=0.0094, 5000=0.0077 (USD)", Stock 1=42844, Supplier 1=Digi-Key, Width=0.012inch
R14: library part "0R 0201", "RES SMD 0 OHM JUMPER 1/20W 0201", Case/Package=0201, Case Code (Metric)=0603, Manufacturer=Panasonic, Manufacturer Part Number=ERJ-1GN0R00C, Max Operating Temperature=125°C, Min Operating Temperature=-55°C, Package Quantity=15000, Power Rating=50mW, Resistance=0mR, Supplier Part Number 1=P15979CT-ND, Temperature Coefficient=600ppm/°C, Tolerance=1%, Voltage Rating=25V, Case Code (Imperial)=0201, ComponentLink1Description=https://datasheet.ciiva.com/22730/1678796-22730749.pdf, ComponentLink1URL=https://datasheet.ciiva.com/22730/1678796-22730749.pdf, Composition="Thick Film", Contact Plating=Tin, Depth=0.3mm, Height=0.23mm, Lead Free="Lead Free", Length=0.6mm, Military Standard=Not, Mount="Surface Mount", Packaging="Tape and Reel", Pricing 1="1=0.1, 10=0.028, 25=0.0204, 50=0.0154, 100=0.0114, 250=0.00872, 500=0.00696, 1000=0.00513, 5000=0.00368 (USD)", REACH SVHC=Unknown, Stock 1=7705948, Supplier 1=Digi-Key, Voltage Rating (DC)=25V, Width=0.3mm
TP1 TP2 TP3 TP4 TP5 TP6 TP7 TP8 TP9 TP10 TP11 TP12 TP13 TP14 TP15 TP16 TP17 TP18 TP19 TP20: "0.5mm SMT Test Point"
U1: "IC MCU 32BIT 128KB FLASH 48LQFP", Case/Package=LQFP, Frequency=48MHz, Manufacturer=STMicroelectronics, Max Operating Temperature=85°C, Max Power Dissipation=364mW, Max Supply Voltage=3.6V, Min Operating Temperature=-40°C, Min Supply Voltage=2.4V, Operating Supply Voltage=3.3V, Package Quantity=250, Supplier Part Number 1=497-15099-ND, ComponentLink1Description=http://www.farnell.com/datasheets/2281751.pdf, ComponentLink1URL=http://www.farnell.com/datasheets/2281751.pdf, ComponentLink2Description=http://www.st.com/st-web-ui/static/active/en/resource/technical/document/datasheet/DM00141386.pdf, ComponentLink2URL=http://www.st.com/st-web-ui/static/active/en/resource/technical/document/datasheet/DM00141386.pdf, ComponentLink3Description=http://www.st.com/content/ccc/resource/technical/document/datasheet/31/4f/10/5f/a5/32/46/42/DM00141386.pdf/files/DM00141386.pdf/jcr:content/translations/en.DM00141386.pdf, ComponentLink3URL=http://www.st.com/content/ccc/resource/technical/document/datasheet/31/4f/10/5f/a5/32/46/42/DM00141386.pdf/files/DM00141386.pdf/jcr:content/translations/en.DM00141386.pdf, ComponentLink4Description=http://www.mouser.com/ds/2/389/stm32f070c6-956182.pdf, ComponentLink4URL=http://www.mouser.com/ds/2/389/stm32f070c6-956182.pdf, Core Architecture=ARM, Data Bus Width=32b, Interface=I2C,SPI,USB,UART,USART, Lead Free="Lead Free", Manufacturer Part Number=STM32F070CBT6, Max Frequency=48MHz, Memory Size=128KB, Memory Type=FLASH, Mount="Surface Mount", Number of ADC Channels=1, Number of I/Os=37, Number of Pins=48, Number of Programmable I/O=37, Number of Timers/Counters=8, Oscillator Type=Internal, Packaging=Tray, Peripherals=POR,PWM,WDT,DMA, Pricing 1="1=2.52, 10=2.268, 100=1.8231, 500=1.49782, 1000=1.24106 (USD)", RAM Size=16KB, Stock 1=10286, Supplier 1=Digi-Key, Watchdog Timer=Yes, Weight=0.006409oz
U2: "STEP-DOWN CONVERTER MICROSIP", Manufacturer="Texas Instruments", Max Operating Temperature=125°C, Min Operating Temperature=-40°C, Supplier Part Number 1=296-47089-1-ND, Manufacturer Part Number=TPS82140SILT, Stock 1=0, Supplier 1=Digi-Key
U3: "IC REG LINEAR 3.3V 500MA 6TMLF", Dropout Voltage=160mV, Manufacturer=Microchip, Max Input Voltage=6V, Max Operating Temperature=125°C, Min Current Limit=600mA, Min Input Voltage=2.6V, Min Operating Temperature=-40°C, Nominal Output Voltage=3.3V, Output Current=500mA, Supplier Part Number 1=576-3680-1-ND, ComponentLink1Description=http://www.farnell.com/datasheets/1692673.pdf, ComponentLink1URL=http://www.farnell.com/datasheets/1692673.pdf, Lead Free="Lead Free", Manufacturer Part Number=MIC5353-3.3YMT-TR, Number of Pins=6, Number of Regulators=1, Output Voltage=3.3V, Packaging="Cut Tape", Pricing 1="1=0.36, 25=0.294, 100=0.273 (USD)", REACH SVHC="No SVHC", Stock 1=24501, Supplier 1=Digi-Key
Y1: library part "16MHz Resonator", "CER RES 16.0000MHZ 15PF SMD", Capacitance=15pF, Case/Package=SMD/SMT, Frequency=16MHz, Frequency Stability=0.3%, Frequency Tolerance=0.5%, Manufacturer=Murata, Max Operating Temperature=80°C, Min Operating Temperature=-20°C, Package Quantity=3000, Supplier Part Number 1=490-1198-1-ND, ComponentLink1Description=https://datasheet.ciiva.com/18183/getdatasheetpartid-152969-18183272.pdf, ComponentLink1URL=https://datasheet.ciiva.com/18183/getdatasheetpartid-152969-18183272.pdf, ComponentLink2Description=https://datasheet.ciiva.com/884/p16e-884477.pdf, ComponentLink2URL=https://datasheet.ciiva.com/884/p16e-884477.pdf, ComponentLink3Description=https://datasheet.ciiva.com/1361/1506176-1361293.pdf, ComponentLink3URL=https://datasheet.ciiva.com/1361/1506176-1361293.pdf, ComponentLink4Description=https://datasheet.ciiva.com/884/p16e-884478.pdf, ComponentLink4URL=https://datasheet.ciiva.com/884/p16e-884478.pdf, ComponentLink5Description=https://datasheet.ciiva.com/884/p16e-884479.pdf, ComponentLink5URL=https://datasheet.ciiva.com/884/p16e-884479.pdf, ComponentLink6Description=https://datasheet.ciiva.com/14132/ceralock-eng-bro-14132735.pdf, ComponentLink6URL=https://datasheet.ciiva.com/14132/ceralock-eng-bro-14132735.pdf, ComponentLink7Description=https://datasheet.ciiva.com/16216/l0430e-16216847.pdf, ComponentLink7URL=https://datasheet.ciiva.com/16216/l0430e-16216847.pdf, Composition=Ceramic, Contact Plating=Gold, Height=0.039inch, Impedance=40R, Lead Free="Lead Free", Length=0.126inch, Load Capacitance=15pF, Manufacturer Part Number=CSTCE16M0V53-R0, Number of Pins=3, Packaging="Tape and Reel", Pricing 1="1=0.5, 10=0.42, 50=0.3776, 100=0.3357, 500=0.3189, 1000=0.2686 (USD)", REACH SVHC="No SVHC", Self Resonant Frequency=16MHz, Stock 1=104178, Supplier 1=Digi-Key, Termination=SMD/SMT, Tolerance=0.5%, Width=0.051inch

## Nets (pads, with @x,y where several pads share a name; then routed paths per layer and width w, separated by ;. In a path a pad name is that pad's centre, name@x,y a point inside that pad or via, vN(x,y) a via of type N, cw(c..) or ccw(c..) an arc to the next point about the centre after c; other vN are vias at no path point)
3V3: C2.2 C3.2 C4.2 C5.2 C6.2 C13.2 D4.1 J1.19 J1.20 L1.1 R6.2 R7.2 TP5.1 U1.1 U1.24 U1.36 U1.48
3V3_EN: R5.1 TP20.1 U3.1
3V3_VOUT: D4.2 U3.4
5V0: C10.2 C12.2 D1.2 D2.2 D3.1 J1.9 J1.10 J1.11 J1.12 J1.13 R5.2 R12.2 TP3.1 U3.3
5V0_EN: R4.1 TP19.1 U2.1
5V0_VOUT: D3.2 R9.2 R10.2 U2.4 U2.5
12V0: C9.2 Q2.2 R4.2 TP1.1 U2.2
12V0_IN: J1.1 J1.2 J1.3 J1.4 Q2.3
BYP: C14.2 U3.6
FB: R10.1 R11.2 U2.6
GND: C1.1 C2.1 C3.1 C4.1 C5.1 C6.1 C7.1 C8.1 C9.1 C10.1 C11.1 C12.1 C13.1 C14.1 J1.5 J1.6 J1.7 J1.8 J1.14 J1.15 J1.16 J1.17 J1.18 J1.21 J1.22 J1.26 J1.27 J1.28 J1.31 J1.32 J1.61 J1.62 J1.63 J1.64 Q1.1 Q1.4 Q2.1 R8.1 R11.1 R13.1 R14.1 TP7.1 TP9.1 TP11.1 U1.8 U1.23 U1.35 U1.47 U2.3 U2.9 U3.2 U3.7 Y1.2
HW_VER: J1.60 R12.1 R13.2